# Altium PCB 4_layer_Memory_card_PCB.PcbDoc
Units mm, origin at the board's own origin, x right, y up, seen from the top; angles counter-clockwise.
Board outline 58.93 x 23.24 mm, 4 copper layers (Top Layer, GND Plane, Power Plane, Bottom Layer), stack 1.592 mm thick; 21 components, 19 nets, 90 pads, 35 vias.
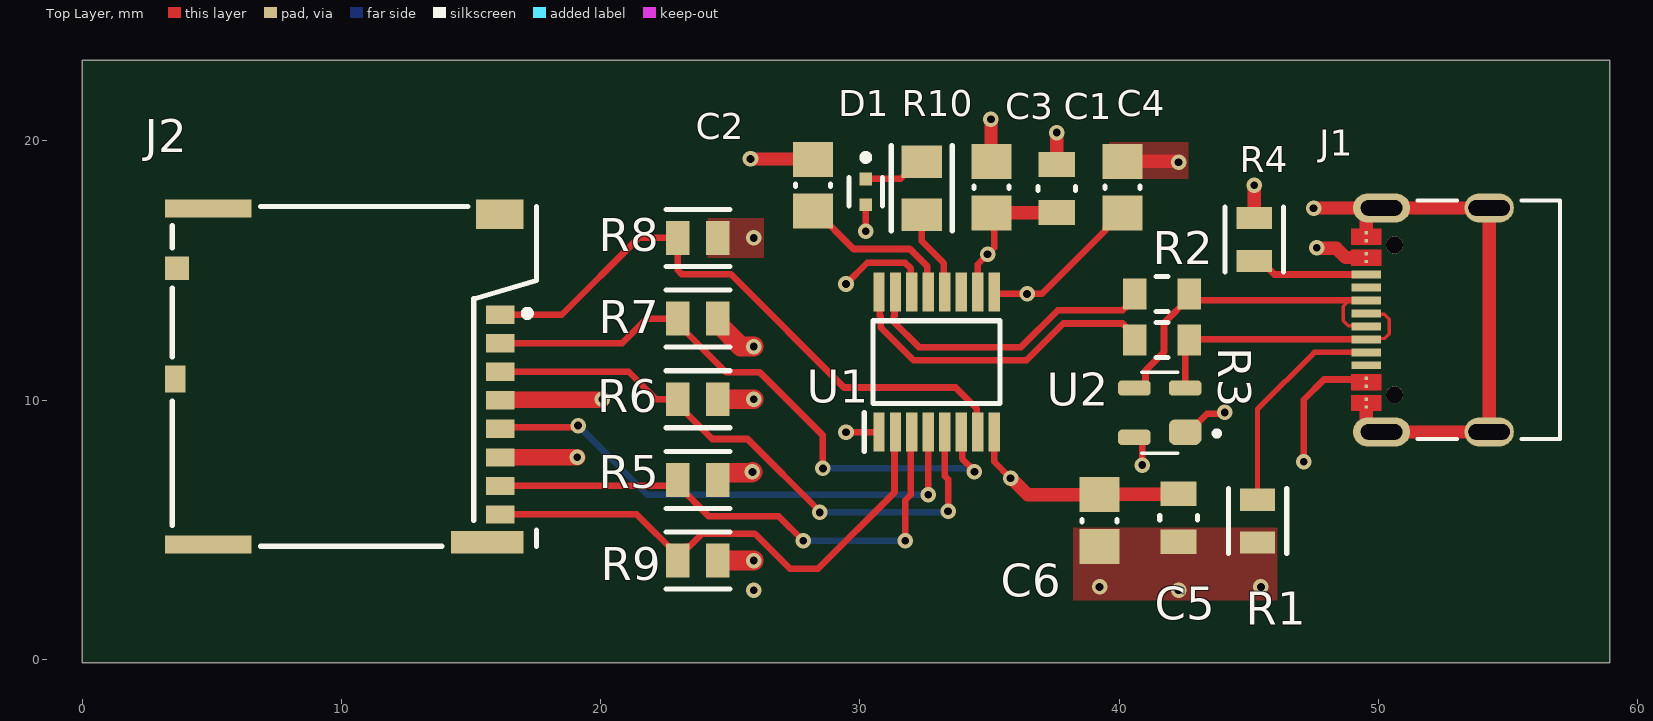
[diagram p0: Top Layer view]
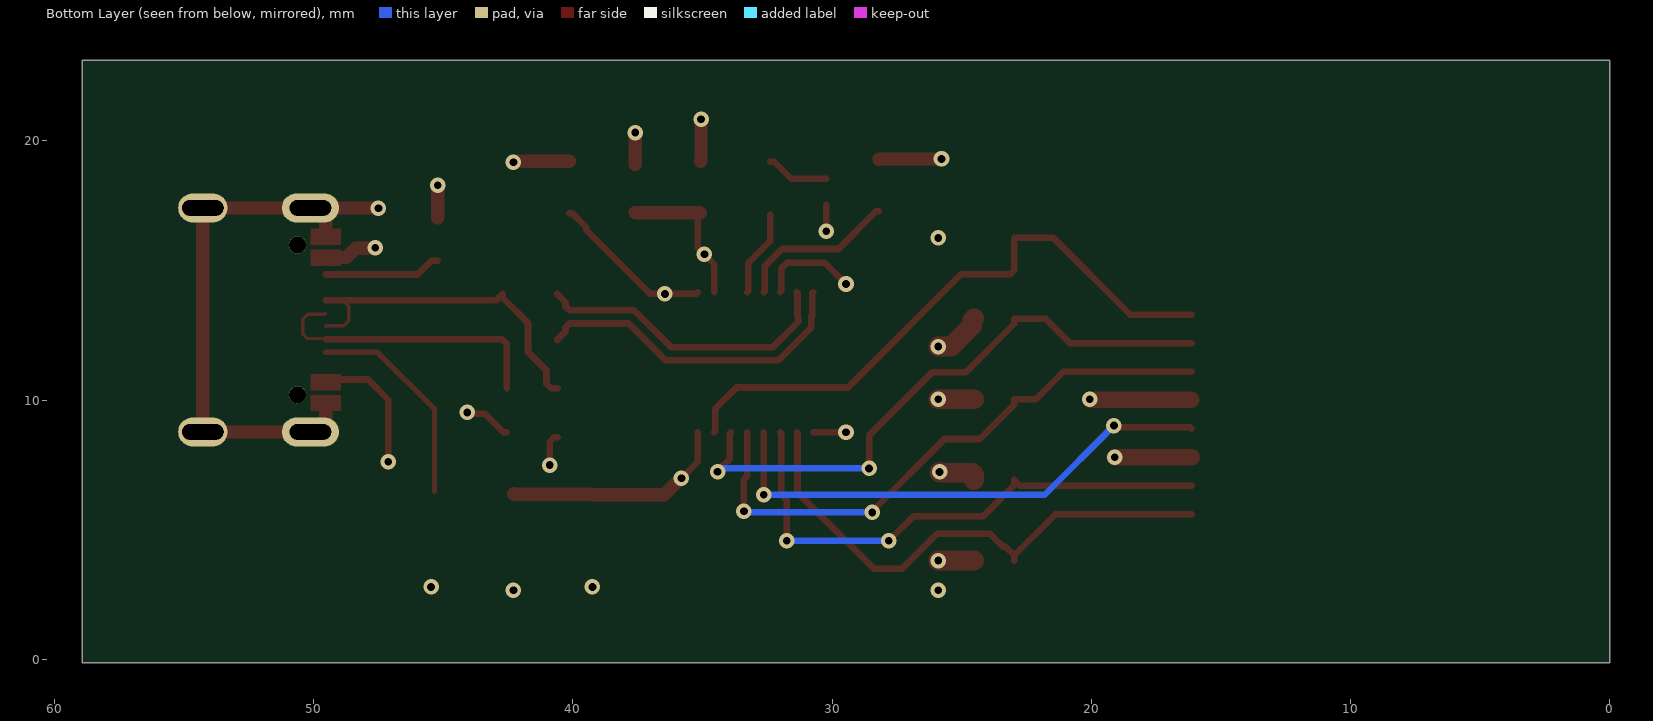
[diagram p1: Bottom Layer view, seen from below]
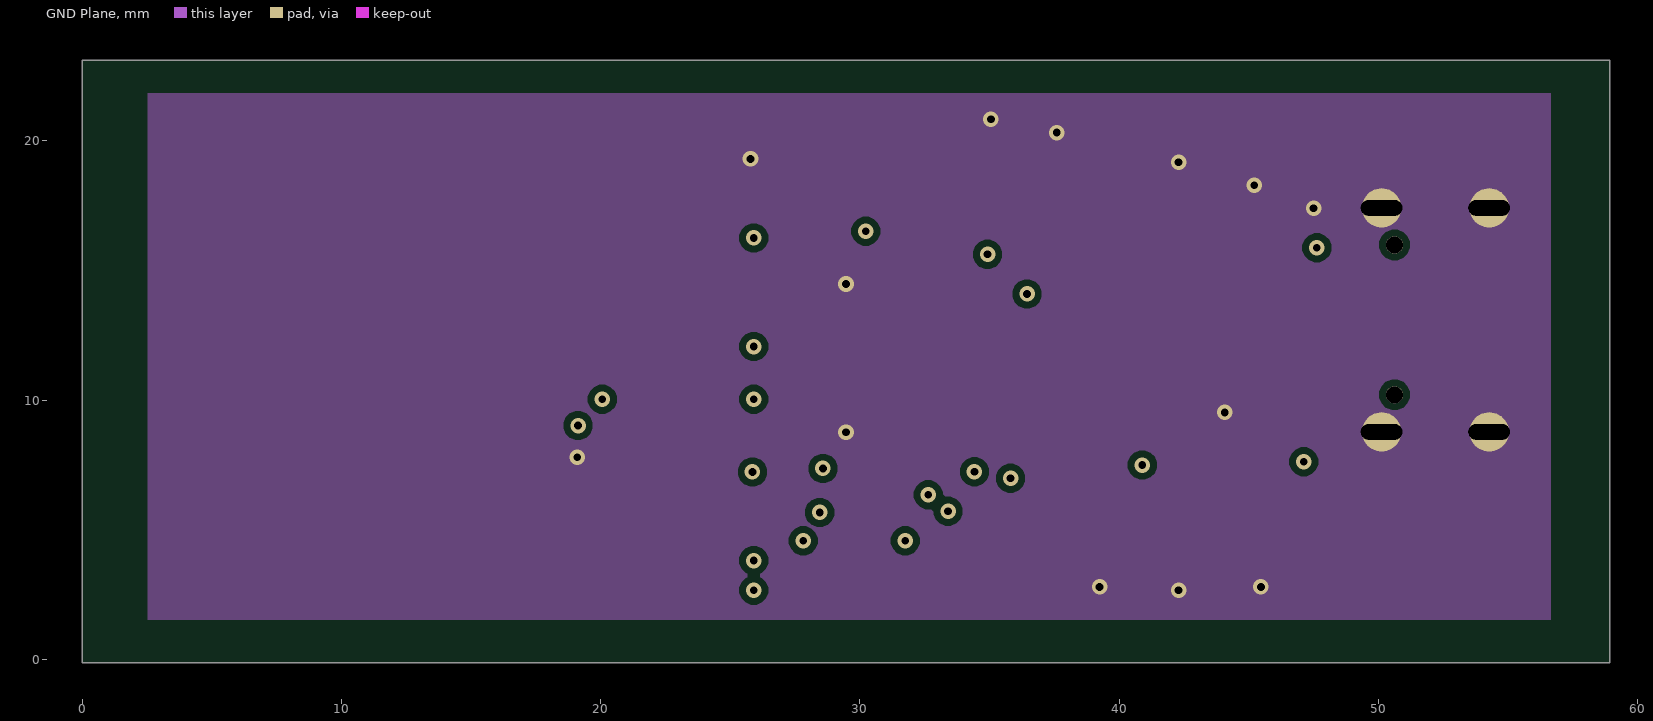
[diagram p2: GND Plane]
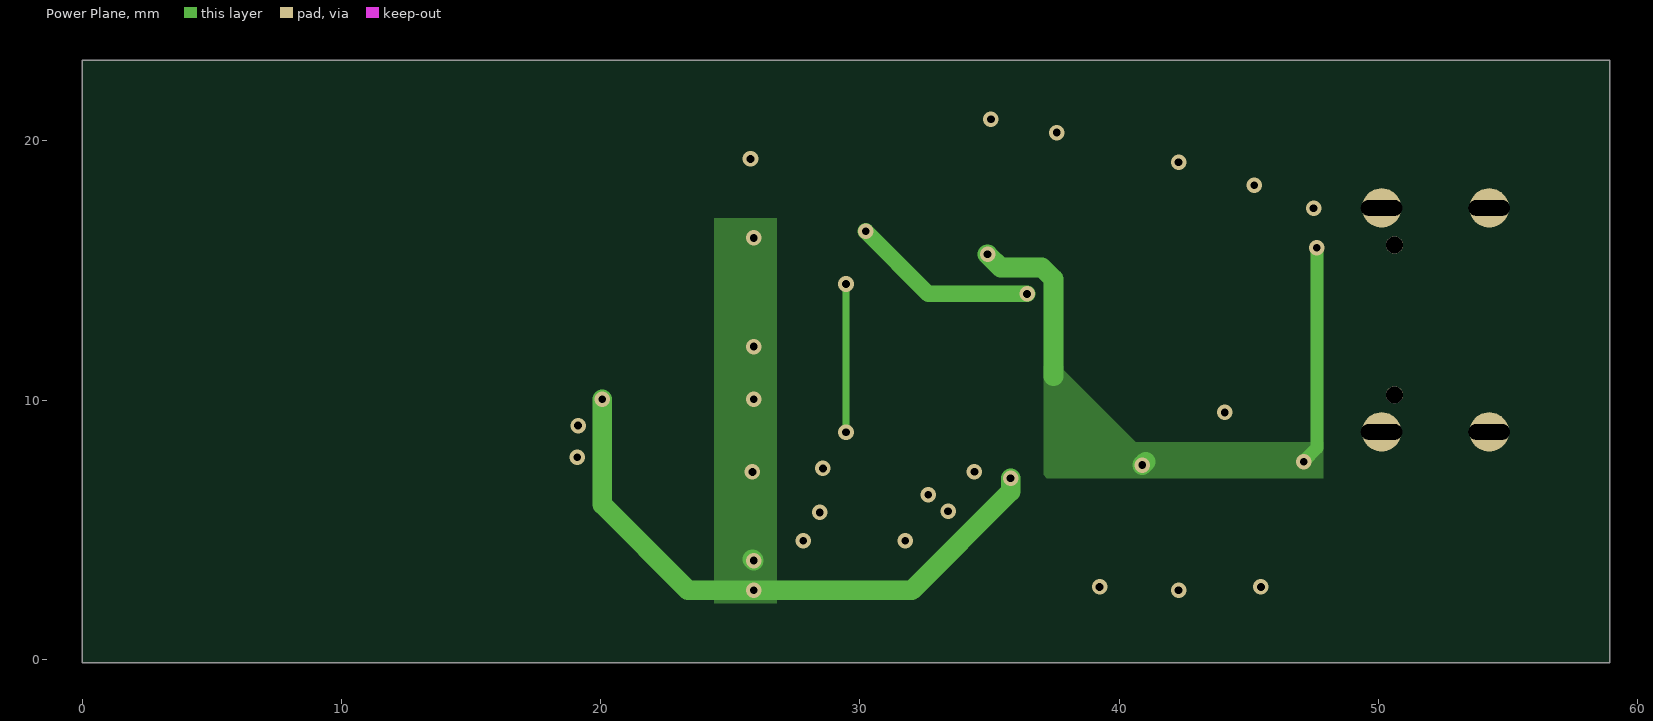
[diagram p3: Power Plane]
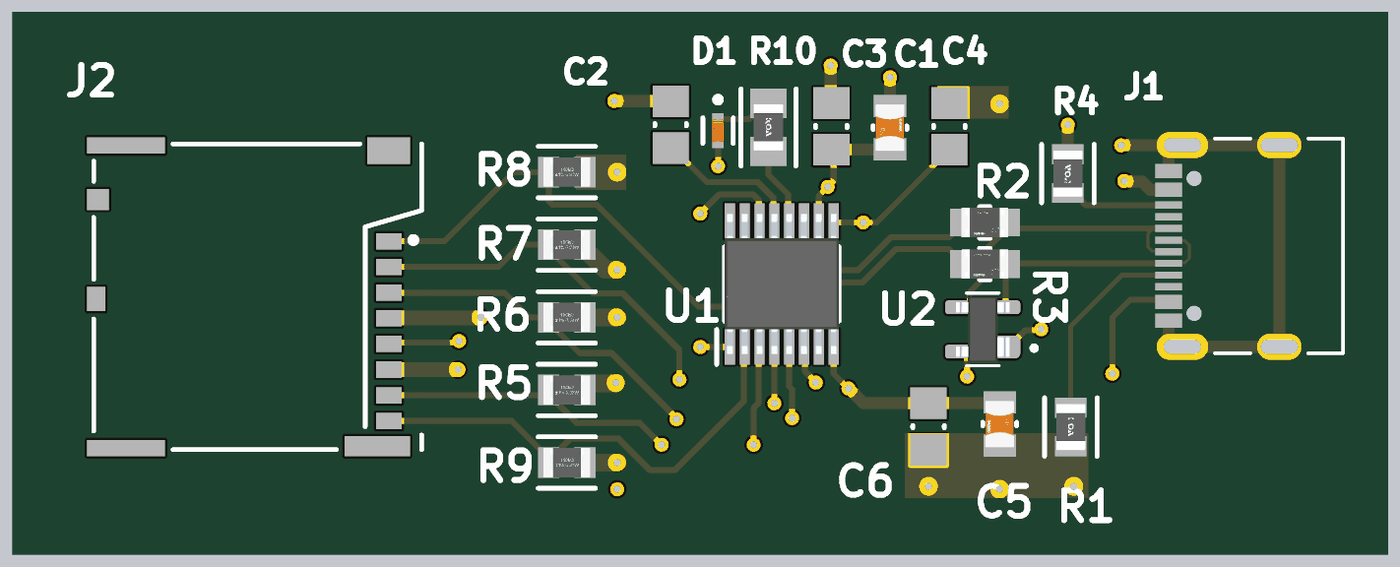
[diagram p4: 3D render of the assembled board from above, using the file's embedded part models]

## Layer stack, top to bottom
Top Solder: solder mask 0.0102, Solder Resist, Dk 3.5
Top Layer: signal copper 0.0356
Dielectric 2: prepreg 0.2104, PP-006, Dk 4.1
GND Plane: signal copper 0.0175
Dielectric 1: dielectric 1.065, FR-4, Dk 4.8
Power Plane: signal copper 0.0175
Dielectric 3: prepreg 0.2104, PP-006, Dk 4.1
Bottom Layer: signal copper 0.0356
Bottom Solder: solder mask 0.0102, Solder Resist, Dk 3.5

## Board outline
0,-0.127 58.928,-0.127 58.928,23.114 0,23.114

## Design rules (kind name [scope] priority, off if disabled: settings)
BoardOutlineClearance [All] p1: gap=0.5 ignorepadtopadclearanceinfootprint=FALSE
Clearance [All] p1: gap=0.254 ignorepadtopadclearanceinfootprint=TRUE
ComponentClearance [All] p1: gap=0.5 collisioncheckmode=3 verticalgap=0.254 showdistances=FALSE
DiffPairsRouting [All] p1: maxlimit=0.254 minlimit=0.254 mostfreqgap=0.254 toplayer_minwidth=0.102 toplayer_maxwidth=0.381 toplayer_prefwidth=0.381 midlayer1_minwidth=0.102 midlayer1_maxwidth=0.381 midlayer1_prefwidth=0.381 midlayer2_minwidth=0.102 midlayer2_maxwidth=0.381 midlayer2_prefwidth=0.381 bottomlayer_minwidth=0.102 bottomlayer_maxwidth=0.381 bottomlayer_prefwidth=0.381 maxuncoupledlength=12.7
MinimumSolderMaskSliver [All] p1: minsoldermaskwidth=0.127
PlaneConnect [All] p1: planeconnectstyle=Direct reliefexpansion=0.508 reliefentries=4 reliefconductorwidth=0.254 reliefairgap=0.254
PolygonConnect [All] p1: connectstyle=Direct reliefconductorwidth=0.254 reliefentries=4 polygonreliefangle="90 Angle" airgapwidth=0.254
RoutingVias [All] p1: holewidth=0.3 width=0.6 viastyle="Through Hole" minholewidth=0.3 minwidth=0.6 maxholewidth=0.3 maxwidth=0.6
SilkToSolderMaskClearance [IsPad] p1: minsilkscreentomaskgap=0.152 clearancetoexposedcopper=TRUE
SolderMaskExpansion [All] p1: expansion=0.102 istentingtop=FALSE
SupplyNets "Schematic Supply Nets" [InNet('GND')] p1: voltage=0.000
Width [All] p1: maxlimit=2.286 minlimit=0.127 preferedwidth=0.254
25 further rules are at their usual default settings.

## Classes and differential pairs
differential pair NewDifferentialPair1: +D_P -D_N

## Components (designator, comment, footprint, x,y, rotation, side; value= is the part's Value field where it differs from the comment)
C1 "1uF 0805" FP-CC0805-0_85-MFG 37.592,18.161 r90 top value="1 uF"
C2 "100nF 16V" CAPC0805(2012)145_M 28.194,18.288 r270 top value=100nF
C3 "100nF 16V" CAPC0805(2012)145_M 35.079,18.212 r270 top value=100nF
C4 "100nF 16V" CAPC0805(2012)145_M 40.132,18.212 r270 top value=100nF
C5 "1uF 0805" FP-CC0805-0_85-MFG 42.291,5.461 r270 top value="1 uF"
C6 "100nF 16V" CAPC0805(2012)145_M 39.243,5.35 r90 top value=100nF
D1 "HSMC-C280" FP-HSMC-C280-MFG 30.226,18.034 r270 top
J1 "USB Type C connector" CONN16_C16PIN_SHN 53.2,13.093 r90 top
J2 "microSD Memory Card" 5033981892 17.529,17.462 r270 top
R1 "5R1K" FP-RN73R2A-IPC_C 45.339,5.334 r270 top
R2 "22R" FP-RT0805-MFG 41.656,14.097 r180 top value=22Ω
R3 "22R" FP-RT0805-MFG 41.656,12.319 r180 top value=22Ω
R4 "5R1K" FP-RN73R2A-IPC_C 45.212,16.192 r90 top
R5 "10k" FP-CRGP0805-IPC_C 23.749,6.921 r0 top value=10KΩ
R6 "10k" FP-CRGP0805-IPC_C 23.749,10.033 r0 top value=10KΩ
R7 "10k" FP-CRGP0805-IPC_C 23.749,13.144 r0 top value=10KΩ
R8 "10k" FP-CRGP0805-IPC_C 23.749,16.256 r0 top value=10KΩ
R9 "10k" FP-CRGP0805-IPC_C 23.749,3.81 r0 top value=10KΩ
R10 "1K" FP-RN73R2A-IPC_A 32.385,18.17 r270 top
U1 "GL823K" SOP64P600X175-16N 32.957,11.463 r90 top
U2 "ESD protection diode" SOT190P230X110-4N 41.565,9.513 r180 top value=1pF

## Footprints (in the part's own frame and the unit in brackets; to place one, negate y for a bottom-side part, rotate by r counter-clockwise, add the part's x,y. Pads: shape width x height; smd on the part's side, far side on the other; paste and mask are expansions set on the pad)
5033981892 [mm]
  rect 0.7x1.1 smd: 1(4.17,-1.4) 2(5.27,-1.4) 3(6.37,-1.4) 4(7.47,-1.4) 5(8.57,-1.4) 6(9.67,-1.4) 7(10.77,-1.4) 8(11.87,-1.4)
  rect 0.9x0.93 smd: 9(2.38,-13.865)
  rect 1.05x0.78 smd: 10(6.645,-13.94)
  rect 0.7x3.33 smd: 11(13.03,-12.665) 14(0.07,-12.665)
  rect 0.86x2.8 smd: 12(12.95,-1.9)
  rect 1.14x1.83 smd: 13(0.29,-1.415)
  silkscreen extent 0,-14.05 13.1,0
CAPC0805(2012)145_M [mm] "Chip Capacitor, Body 2.0x1.2mm, Height 1.45mm, IPC Low Density"
  rect 1.35x1.55 smd: 1(-1,0) 2(1,0)
  silkscreen extent -0.05,-0.67 0.05,0.67, body extent -1.1,-0.72 1.1,0.72, height 1.45
CONN16_C16PIN_SHN [mil]
  round 26 hole 26 unplated paste-99999 mask+0: 29(-113.78,101.55) 30(113.78,101.55)
  rect 5x5 smd paste-2.5 mask-2.5: A1(-132.29,144.5) A4(-100.61,144.5) A9(100.61,144.5) A12(132.3,144.5) B1(120.3,144.5) B4(88.61,144.5) B9(-88.61,144.5) B12(-120.29,144.5)
  rect 12x45 smd paste+0 mask+0: A5(-49.22,144.5) A6(-9.85,144.5) A7(9.85,144.5) A8(-68.91,144.5) B5(68.92,144.5) B6(29.54,144.5) B7(-29.53,144.5) B8(49.23,144.5)
  oval 44x87 / inner round 60 / far side oval 44x87 hole 23.62 slot 62.99 at 90 deg paste-99999 mask+0: S1(-170.08,121.23) S2(170.08,121.23)
  oval 44x75 / inner round 60 / far side oval 44x75 hole 23.62 slot 62.99 at 90 deg paste-99999 mask+0: S3(-170.08,-42.15) S4(170.08,-42.15)
  Top Layer region: -114.29,122 -138.29,122 -138.29,167 -114.29,167
  Top Layer region: 114.3,167 138.3,167 138.3,122 114.3,122
  Top Layer region: 82.61,167 106.61,167 106.61,122 82.61,122
  Top Layer region: -106.61,122 -106.61,167 -82.61,167 -82.61,122
  silkscreen extent -181,-150 181,66
FP-CC0805-0_85-MFG [mm]
  rect 0.95x1.4 smd paste+0 mask+0: 1(-0.925,0) 2(0.925,0)
  silkscreen extent -0.08,-0.72 0.08,0.72, body extent -1.6,-1.05 1.6,1.05, height 0.25
FP-CRGP0805-IPC_C [mm]
  rect 0.906x1.31 smd paste+0 mask+0: 1(-0.776,0) 2(0.776,0)
  silkscreen extent -1.23,-1.1 1.23,1.1, body extent -1.33,-0.8 1.33,0.8, height 0.25
FP-HSMC-C280-MFG [mm]
  rect 0.5x0.5 smd paste+0 mask+0: 1(-0.5,0) 2(0.5,0)
  silkscreen extent -1.45,-0.65 0.55,0.65, body extent -0.85,-0.4 0.85,0.4, height 0.25
FP-RN73R2A-IPC_A [mm]
  rect 1.255x1.556 smd paste+0 mask+0: 1(-1.025,0) 2(1.025,0)
  silkscreen extent -1.65,-1.18 1.65,1.18, body extent -2.15,-1.28 2.15,1.28, height 0.25
FP-RN73R2A-IPC_C [mil]
  rect 33.67x53.39 smd paste+0 mask+0: 1(-32.5,0) 2(32.5,0)
  silkscreen extent -49,-44 49,44, body extent -53,-32 53,32, height 10
FP-RT0805-MFG [mm]
  rect 0.9x1.2 smd paste+0 mask+0: 1(-1.05,0) 2(1.05,0)
  silkscreen extent -0.23,-0.67 0.23,0.67, body extent -1.6,-0.77 1.6,0.77, height 0.25
SOP64P600X175-16N [mm]
  rect 1.5x0.435 smd: 1(-2.7,2.222) 2(-2.7,1.588) 3(-2.7,0.952) 4(-2.7,0.318) 5(-2.7,-0.318) 6(-2.7,-0.952) 7(-2.7,-1.588) 8(-2.7,-2.222) 9(2.7,-2.222) 10(2.7,-1.588) 11(2.7,-0.952) 12(2.7,-0.318) 13(2.7,0.318) 14(2.7,0.952) 15(2.7,1.588) 16(2.7,2.222)
  silkscreen extent -3.45,-2.45 1.6,2.79, body extent -3,-2.45 3,2.45, height 1.75
SOT190P230X110-4N [mm]
  rrect50% 1.26x0.99 smd: 1(-0.98,0.75)
  rrect50% 1.26x0.59 smd: 2(-0.98,-0.95) 3(0.98,-0.95) 4(0.98,0.95)
  silkscreen extent -2.3,-1.56 0.7,1.56, body extent -1.15,-1.45 1.15,1.45, height 1.1

## Part data
C1 C5: library part CMP-03422-000058-1, "CC0805 1 uF X7R 10.00% 16 V", Capacitance="1 uF", Manufacturer=Yageo, Manufacturer Part Number=CC0805KFX7R7BB105, Package=CC0805-0.85, Temperature="-30°C to +85°C", Temperature Characteristic=X7R, Temperature Range High=+85°C, Temperature Range Low=-30°C, Tolerance=0.1, Voltage Rating="16 V", Automotive=No, Category=Cap, ComponentLink2Description=Datasheet, ComponentLink2URL=http://www.yageo.com/documents/recent/UPY-GPHC_Y5V_6.3V-to-50V_8.pdf, Device Class L1="Passive Components", Device Class L2=Capacitors, Device Class L3="Ceramic Capacitors", Footprint Url=http://www.yageo.com/exep/pages/download/literatures/UPY-C_GEN_24.pdf, Height=0.95mm, Ipc Land Pattern Name=CAPC200125X85, Lead Free=Yes, Material=Ceramic, Mouser Description="Multilayer Ceramic Capacitors MLCC - SMD/SMT 1.0uF 16V X7R 10%", Octopart=https://octopart.com/cc0805kfx7r7bb105-yageo-30261725, RoHS=TRUE
C2 C3 C4 C6: library part CMP-1036-04399-1, "CAP 100nF 16V ±5% 0805 (2012 Metric) Thickness 1.45mm SMD", Case-EIA=0805, Case-Metric=2012, Rated Voltage="16 V", Tolerance=Â±5%, Max Thickness="1.45 mm", Technology=SMT
D1: library part CMP-18399-000022-1, "LED RED DIFFUSED 0402 SMD", Case Code (Imperial)=0402, Case Code (Metric)=1005, Color=Red, Forward Current=20mA, Forward Voltage=1.9V, Lens Color=White, Max Operating Temperature=85°C, Max Power Dissipation=60mW, Min Operating Temperature=-40°C, Package Quantity=4000, Reverse Voltage=5V, Case/Package=0402, Contact Plating=Gold, Depth=0.5mm, Dominant Wavelength=626nm, Height=0.4mm, Illumination Color=Red, Lead Free="Lead Free", Length=1mm, Lens Style=Diffused, Lens Transparency=Diffused, Luminous Flux=155lm, Luminous Intensity=90mcd, Mount="Surface Mount", Number of Elements=1, Number of LEDs=1, Number of Pins=2, Packaging="Tape and Reel", Power Dissipation=60mW, Power Rating=60mW, Radiation Hardening=No, REACH SVHC="No SVHC", Test Current=20mA, Viewing Angle=130°, Wavelength=626nm, Width=0.5mm
J1: library part "TYPE-C 16PIN 2MD(073) SHOU HAN", "https://jlcpcb.com/partdetail/ShouHan-TYPE_C_16PIN_2MD_073/C2765186?utm_source=chatgpt.com"
J2: library part 503398-1892, "1.10mm Pitch microSD Memory Card Connector, Normal Mount Surface Mount, Push-Push Type, 1.28mm Height", Contact Resistance=100mΩ, Current Rating=500mA, Insulation Resistance=1GΩ, Manufacturer=Molex, Manufacturer Lifecycle Status=ACTIVE, Max Operating Temperature=85°C, Min Operating Temperature=-25°C, Supplier Part Number=8801277, Voltage Rating=10V, Category="Memory Connectors", China RoHS=Compliant, ComponentLink1Description=https://datasheet.octopart.com:443/503398-1892-Molex-datasheet-180775278.pdf?src-supplier=IHS, ComponentLink1URL=https://datasheet.octopart.com:443/503398-1892-Molex-datasheet-180775278.pdf?src-supplier=IHS, ComponentLink2Description=https://datasheet.octopart.com:443/503398-1892-Molex-datasheet-138898078.pdf?src-supplier=Sager+Electronics, ComponentLink2URL=https://datasheet.octopart.com:443/503398-1892-Molex-datasheet-138898078.pdf?src-supplier=Sager+Electronics, ComponentLink3Description=https://datasheet.octopart.com:443/503398-1892-Molex-datasheet-16405786.pdf?src-supplier=Sager+Electronics, ComponentLink3URL=https://datasheet.octopart.com:443/503398-1892-Molex-datasheet-16405786.pdf?src-supplier=Sager+Electronics, ComponentLink4Description=https://sigma.octopart.com:443/138898079/technical_drawing/Molex-503398-1892.pdf?src-supplier=Upverter, ComponentLink4URL=https://sigma.octopart.com:443/138898079/technical_drawing/Molex-503398-1892.pdf?src-supplier=Upverter, ComponentLink5Description=https://sigma.octopart.com:443/16405789/technical_drawing/Molex-503398-1892.pdf?src-supplier=Molex, ComponentLink5URL=https://sigma.octopart.com:443/16405789/technical_drawing/Molex-503398-1892.pdf?src-supplier=Molex, ComponentLink6Description=https://datasheet.octopart.com:443/503398-1892-Molex-datasheet-66628509.pdf?src-supplier=Farnell, ComponentLink6URL=https://datasheet.octopart.com:443/503398-1892-Molex-datasheet-66628509.pdf?src-supplier=Farnell, ComponentLink7Description=https://datasheet.octopart.com:443/503398-1892-Molex-datasheet-10952502.pdf?src-supplier=Newark, ComponentLink7URL=https://datasheet.octopart.com:443/503398-1892-Molex-datasheet-10952502.pdf?src-supplier=Newark, ComponentLink8Description=https://datasheet.octopart.com:443/503398-1892-Molex-datasheet-62087832.pdf?src-supplier=Newark, ComponentLink8URL=https://datasheet.octopart.com:443/503398-1892-Molex-datasheet-62087832.pdf?src-supplier=Newark, ComponentLink9Description=https://datasheet.octopart.com:443/503398-1892-Molex-datasheet-154753182.pdf?src-supplier=Master+Electronics, ComponentLink9URL=https://datasheet.octopart.com:443/503398-1892-Molex-datasheet-154753182.pdf?src-supplier=Master+Electronics, ComponentLink10Description=https://datasheet.octopart.com:443/503398-1892-Molex-datasheet-17852981.pdf?src-supplier=element14+APAC, ComponentLink10URL=https://datasheet.octopart.com:443/503398-1892-Molex-datasheet-17852981.pdf?src-supplier=element14+APAC, ComponentLink11Description=https://datasheet.octopart.com:443/503398-1892-Molex-datasheet-140185767.pdf?src-supplier=RS+(Formerly+Allied+Electronics), ComponentLink11URL=https://datasheet.octopart.com:443/503398-1892-Molex-datasheet-140185767.pdf?src-supplier=RS+(Formerly+Allied+Electronics), ComponentLink12Description=https://datasheet.octopart.com:443/503398-1892-Molex-datasheet-120152253.pdf?src-supplier=RS+(Formerly+Allied+Electronics), ComponentLink12URL=https://datasheet.octopart.com:443/503398-1892-Molex-datasheet-120152253.pdf?src-supplier=RS+(Formerly+Allied+Electronics), ComponentLink13Description=https://datasheet.octopart.com:443/503398-1892-Molex-datasheet-62059324.pdf?src-supplier=RS+(Formerly+Allied+Electronics), ComponentLink13URL=https://datasheet.octopart.com:443/503398-1892-Molex-datasheet-62059324.pdf?src-supplier=RS+(Formerly+Allied+Electronics), ComponentLink14Description=https://datasheet.octopart.com:443/503398-1892-Molex-datasheet-24577251.pdf?src-supplier=TME, ComponentLink14URL=https://datasheet.octopart.com:443/503398-1892-Molex-datasheet-24577251.pdf?src-supplier=TME, ComponentLink15Description=http://sigma.octopart.com:80/16405788/rohs_statement/Molex-503398-1892.pdf?src-supplier=Compliance+Statements, ComponentLink15URL=http://sigma.octopart.com:80/16405788/rohs_statement/Molex-503398-1892.pdf?src-supplier=Compliance+Statements, ComponentLink16Description=http://sigma.octopart.com:80/reach_statement/Molex-company-74.pdf?src-supplier=Compliance+Statements, ComponentLink16URL=http://sigma.octopart.com:80/reach_statement/Molex-company-74.pdf?src-supplier=Compliance+Statements, ComponentLink17Description=http://sigma.octopart.com:80/rohs_statement/Molex-company-73.pdf?src-supplier=Compliance+Statements, ComponentLink17URL=http://sigma.octopart.com:80/rohs_statement/Molex-company-73.pdf?src-supplier=Compliance+Statements, ComponentLink18Description=http://sigma.octopart.com:80/conflict_mineral_statement/Molex-company-72.pdf?src-supplier=Compliance+Statements, ComponentLink18URL=http://sigma.octopart.com:80/conflict_mineral_statement/Molex-company-72.pdf?src-supplier=Compliance+Statements, Connector Type=Connector, Contact Gender=Female, Contact Material="Gold, Tin", Contact Plating=Gold, Country of Origin=VN, Depth=14.05mm, Export Control Classification Number (ECCN) Code=EAR99, Gender=Male, Halogen Free="Low Halogen", Harmonized Tariff Schedule (HTS) Code=8536.69.40.40, Height=1.4mm, Housing Material="Stainless Steel", Introduction Date=2013-02-28, Length=13.6mm, Lifecycle Status=Production, Manufacturer Part Number=503398-1892, Memory Format=FLASH, Mounting Technology="Surface Mount", Number of Circuits=8, Number of Contacts=8, Number of Ports=1, Number of Rows=1, Orientation="Right Angle", Packaging="Cut Tape", Pins=8, Pitch=1.1mm, Plating=Tin, Plating Thickness=508nm, Pricing="1=1.86, 10=1.42, 20=1.39, 50=1.36, 100=1.32 (GBP)", Radiation Hardening=No, REACH SVHC=Yes, RoHS=Compliant, Schedule B="8536695050, 8536695050|8536695050, 8536695050|8536695050|8536695050, 8536695050|8536695050|8536695050|8536695050", Stock=952, Supplier=RS, Terminal Pitch=1.1mm, Termination=Solder, Voltage Rating (AC)=10V, Width=14.05mm
R1 R4: library part CMP-04015-014497-1, "5.1kΩ ±0.05% 0.125W, 1/8W Chip Resistor 0805 (2012 Metric) Moisture Resistant Thin Film"
R2 R3: library part CMP-03412-017128-1, "RES SMD 22 OHM 1% 1/8W 0805", Manufacturer=Yageo, Manufacturer Part Number=RT0805FRD0722RL, Package=RT0805, Power Rating=0.125W, Resistance=22Ω, Temperature="-55°C to +155°C", Temperature Coefficient="25 ppm/°C", Temperature Range High=+155°C, Temperature Range Low=-55°C, Tolerance=0.0001, Voltage Rating=150V, Automotive=No, Category=Res, ComponentLink2Description=Datasheet, ComponentLink2URL=http://www.yageo.com/documents/recent/PYu-RT_1-to-0.01_RoHS_L_9.pdf, Composition="Thin Film", Device Class L1="Passive Components", Device Class L2=Resistors, Device Class L3="Chip SMD Resistors", Digikey Description="RES SMD 22 OHM 1% 1/8W 0805", Footprint Url=http://www.yageo.com/exep/pages/download/literatures/PYu-R_Mount_10.pdf, Height=0.6mm, Ipc Land Pattern Name=RESC200125X50, Lead Free=Yes, Octopart=https://octopart.com/rt0805frd0722rl-yageo-71399874, RoHS=TRUE, Series=RT
R5 R6 R7 R8 R9: library part CMP-03211-006861-1, "CRGP 0805 10K 1% CRGP0805F10K", Ambient Temperature Range High=+70°C, Manufacturer=TE, Manufacturer Part Number=CRGP0805F10K, Package=CRGP0805, Power Rating=0.33W, Resistance=10KΩ, Temperature="-55°C to +155°C", Temperature Coefficient=±100ppm/°C, Temperature Range High=+155°C, Temperature Range Low=-55°C, Tolerance=0.01, Voltage Rating=150V, Automotive=No, Category=Res, ComponentLink2Description=Datasheet, ComponentLink2URL=https://www.mouser.com/datasheet/2/418/NG_DS_9-1773463-9_A-1358566.pdf, Composition="Thick Film", Device Class L1="Passive Components", Device Class L2=Resistors, Device Class L3="Chip SMD Resistors", Digikey Description="CRGP 0805 10K 1%", Height=0.65mm, Ipc Land Pattern Name=RESC200125X55, Lead Free=Yes, Octopart=https://octopart.com/crgp0805f10k-te+connectivity-91018782, RoHS=TRUE, Series=CRGP
R10: library part CMP-04015-026717-1, "1kΩ ±0.1% 0.125W, 1/8W Chip Resistor 0805 (2012 Metric) Moisture Resistant Thin Film"
U1: library part GL823K-HCY04, "USB 2.0 card reader controller"
U2: library part PRTR5V0U2X,215, "PRTR Series 9 V 1 pF Rail-to-Rail ESD Protection Diode - SOT-143B", Ambient Temperature Range High=85°C, Breakdown Voltage=7.5V, Manufacturer=Nexperia, Manufacturer Lifecycle Status="RELEASED FOR SUPPLY", Max Breakdown Voltage=9V, Min Breakdown Voltage=6V, Min Operating Temperature=-40°C, Operating Supply Voltage=700mV, Peak Reverse Current=100nA, Reverse Standoff Voltage=3V, Supplier Part Number=1727-3884-1-ND, Category="ESD and Circuit Protection ICs", China RoHS=Compliant, ComponentLink1Description=https://datasheet.octopart.com:443/PRTR5V0U2X%2C215-Nexperia-datasheet-180924939.pdf?src-supplier=IHS, ComponentLink2Description=https://datasheet.octopart.com:443/PRTR5V0U2X%2C215-Nexperia-datasheet-5405949.pdf?src-supplier=IHS, ComponentLink2URL=https://datasheet.octopart.com:443/PRTR5V0U2X%2C215-Nexperia-datasheet-5405949.pdf?src-supplier=IHS, ComponentLink3Description=https://datasheet.octopart.com:443/PRTR5V0U2X%2C215-Nexperia-datasheet-137756210.pdf?src-supplier=Newark, ComponentLink3URL=https://datasheet.octopart.com:443/PRTR5V0U2X%2C215-Nexperia-datasheet-137756210.pdf?src-supplier=Newark, ComponentLink4Description=https://sigma.octopart.com:443/138810744/technical_drawing/Nexperia-PRTR5V0U2X%2C215.pdf?src-supplier=Upverter, ComponentLink4URL=https://sigma.octopart.com:443/138810744/technical_drawing/Nexperia-PRTR5V0U2X%2C215.pdf?src-supplier=Upverter, ComponentLink5Description=https://datasheet.octopart.com:443/PRTR5V0U2X%2C215-Nexperia-datasheet-87582154.pdf?src-supplier=Nexperia, ComponentLink5URL=https://datasheet.octopart.com:443/PRTR5V0U2X%2C215-Nexperia-datasheet-87582154.pdf?src-supplier=Nexperia, ComponentLink6Description=https://datasheet.octopart.com:443/PRTR5V0U2X%2C215-NXP-Semiconductors-datasheet-15938047.pdf?src-supplier=iiiC, ComponentLink6URL=https://datasheet.octopart.com:443/PRTR5V0U2X%2C215-NXP-Semiconductors-datasheet-15938047.pdf?src-supplier=iiiC, ComponentLink7Description=http://sigma.octopart.com:80/reach_statement/NXP-Semiconductors-company-13.pdf?src-supplier=Compliance+Statements, ComponentLink7URL=http://sigma.octopart.com:80/reach_statement/NXP-Semiconductors-company-13.pdf?src-supplier=Compliance+Statements, ComponentLink8Description=http://sigma.octopart.com:80/rohs_statement/NXP-Semiconductors-company-12.pdf?src-supplier=Compliance+Statements, ComponentLink8URL=http://sigma.octopart.com:80/rohs_statement/NXP-Semiconductors-company-12.pdf?src-supplier=Compliance+Statements, Contact Plating=Tin, Country of Origin="Mainland China", Direction=Bidirectional, Export Control Classification Number (ECCN) Code=EAR99, Harmonized Tariff Schedule (HTS) Code=8541.10.00.50, Height=1.1mm, Introduction Date=2005-09-23, Lifecycle Status=Production, Manufacturer Part Number=PRTR5V0U2X,215, Max Operating Temperature=85°C, Number of Channels=2, Number of Elements=1, Number of Terminals=4, Pins=4, Polarity=Unidirectional, Pricing="1=0.66, 10=0.41, 100=0.2626, 500=0.19912, 1000=0.17862, 3000=0.15255, 6000=0.13942, 9000=0.13273, 15000=0.1252, 21000=0.12075, 30000=0.11642, 75000=0.11275 (USD)", REACH SVHC=Yes, RoHS=Compliant, Schedule B="8541100080, 8541100080|8541100080|8541100080|8541100080|8541100080|8541100080|8541100080|8541100080|8541100080|8541100080|8541100080|8541100080|8541100080|8541100080|8541100080|8541100080|8541100080|8541100080|8541100080|8541100080|8541100080|8541100080|8541100080|85", Supplier=DigiKey

## Via types
v1: diameter 0.6, hole 0.3, Top Layer to Bottom Layer, 35 vias

## Nets (pads, with @x,y where several pads share a name; then routed paths per layer and width w, separated by ;. In a path a pad name is that pad's centre, name@x,y a point inside that pad or via, vN(x,y) a via of type N, cw(c..) or ccw(c..) an arc to the next point about the centre after c; other vN are vias at no path point)
3.3_VDDA: C2.2 U1.13 | length 6.3
  Top Layer w0.254: C2.2 28.294,17.288 29.753,15.829 31.928,15.829 32.604,15.153 32.604,14.198 U1.13
3V_VDD: C4.2 D1.2 U1.9 | length 14.7
  Top Layer w0.254: v1(30.226,16.51) D1.2 ; U1.9 35.245,14.097 v1@36.543,14.097 ; v1(36.449,14.097) 37.017,14.097 39.484,16.564 39.484,16.663 40.032,17.211 C4.2
  Power Plane w0.635: v1(30.226,16.51) 32.639,14.097 v1(36.449,14.097)
5V_BUS: C1.1 C3.2 J1.A4 J1.A9 J1.B4 J1.B9 U1.10 U2.4 | length 29.7
  Top Layer w0.254: U1.10 34.545,15.241 v1(34.925,15.621) 35.179,15.875 35.179,17.111 C3.2 ; U2.4 40.728,8.563 40.894,8.397 v1(40.894,7.493) ; v1(47.117,7.62) 47.117,10.011 47.901,10.795 49.483,10.795 J1.B9
  Top Layer w0.508: C3.2 35.091,17.224 37.58,17.224 C1.1 ; v1(47.625,15.875) 47.643,15.857 48.379,15.857 48.742,15.494 49.53,15.494
  Power Plane w0.508: v1(47.117,7.62) 47.117,7.645 47.625,8.153 v1(47.625,15.875)
  Power Plane w0.762: v1(34.925,15.621) 35.433,15.113 37.019,15.113 37.465,14.667 37.465,10.922 ; v1(40.894,7.493) v1@41.021,7.62
D_N: R3.2 U1.16 | length 12.7
  Top Layer w0.254: U1.16 30.77,14.128 30.77,13.255 30.798,13.228 30.798,12.807 32.07,11.535 36.427,11.535 37.846,12.954 40.134,12.954 40.283,12.805 40.283,12.642 R3.2
D_P: R2.2 U1.15 | length 11.8
  Top Layer w0.254: U1.15 31.334,14.128 31.334,13.255 31.306,13.228 31.306,13.017 32.28,12.043 36.217,12.043 37.636,13.462 40.134,13.462 40.283,13.611 40.283,13.774 R2.2
DAT0: J2.7 R5.1 U1.3 | length 21.1
  Top Layer w0.254: J2.7 22.743,6.692 R5.1 22.973,6.72 24.177,5.516 26.869,5.516 v1(27.813,4.572) ; v1(31.75,4.572) 31.75,6.14 31.958,6.348 31.958,7.846 31.968,7.855 31.968,8.725 U1.3
  Bottom Layer w0.254: v1(27.813,4.572) v1(31.75,4.572)
DAT1: J2.8 R9.1 U1.2 | length 20.7
  Top Layer w0.254: J2.8 21.393,5.592 R9.1@22.973,4.012 ; U1.2 31.334,8.728 31.334,6.442 28.384,3.492 27.303,3.492 25.95,4.846 23.908,4.846 23.4,4.338 23.299,4.338 R9.1@22.973,4.012 ; R9.1@22.973,4.012 R9.1 R9.1@22.973,4.012
DAT2: J2.1 R8.1 U1.7 | length 24
  Top Layer w0.254: J2.1 18.499,13.292 21.463,16.256 R8.1 22.973,15.008 23.122,14.859 25.019,14.859 29.391,10.487 33.691,10.487 34.508,9.671 34.508,8.801 U1.7
DAT3: J2.2 R7.1 U1.6 | length 23.7
  Top Layer w0.254: J2.2 20.828,12.192 21.78,13.144 R7.1 22.973,12.943 24.847,11.069 26.142,11.069 28.575,8.636 v1(28.575,7.366) ; U1.6 33.947,8.725 33.947,7.732 34.417,7.261 v1(34.417,7.239)
  Bottom Layer w0.254: v1(28.575,7.366) 34.196,7.366 34.323,7.239 v1(34.417,7.239)
GND: C1.2 C2.1 C3.1 C4.1 C5.2 C6.1 J1.A1 J1.A12 J1.B1 J1.B12 J1.S1 J1.S2 J1.S3 J1.S4 J2.6 R1.2 R4.2 U1.1 U1.14 U2.1 | length 46.7
  Top Layer w0.254: v1(29.464,8.763) U1.1 ; v1(29.464,14.478) 30.28,15.294 31.744,15.294 31.968,15.071 31.968,14.2 U1.14 ; U2.1 42.68,8.763 43.388,9.471 44.015,9.471 v1(44.069,9.525)
  Top Layer w0.508: v1(25.781,19.304) 25.789,19.296 28.186,19.296 C2.1 ; v1(35.052,20.828) 35.052,19.238 C3.1 ; C1.2 v1(37.592,20.32) ; C4.1 42.232,19.212 42.266,19.177 v1(42.291,19.177) ; R4.2 v1(45.212,18.288) ; v1(47.498,17.399) 47.505,17.406 50.114,17.406 J1.S2 ; J1.A1 49.53,9.054 49.812,8.773 J1.S1 J1.S3 J1.S4 J1.S2 ; J1.A12 49.53,17.131 49.812,17.413 J1.S2
  Top Layer w0.635: J2.6 v1(19.095,7.792)
  Power Plane w0.254: v1(29.464,8.763) v1(29.464,14.478)
  other v1: 42.291,2.667 39.243,2.794 45.466,2.794
LED: R10.2 U1.12 | length 3.4
  Top Layer w0.254: R10.2 32.385,16.136 33.238,15.284 33.238,14.2 U1.12
NetD1_1: D1.1 R10.1 | length 2.4
  Top Layer w0.254: D1.1 31.573,18.534 32.235,19.196 R10.1
NetJ1_A5: J1.A5 R1.1 | length 8.3
  Top Layer w0.203: R1.1@45.339,6.477 45.339,9.652 47.529,11.842 J1.A5
NetJ1_B5: J1.B5 R4.1 | length 4.5
  Top Layer w0.254: R4.1 45.462,15.367 45.986,14.843 J1.B5
SD_3V3: C5.1 C6.2 J2.4 R5.2 R6.2 R7.2 R8.2 R9.2 U1.8 | length 42.4
  Top Layer w0.254: J2.4 J2.4@16.15,10.012 ; U1.8 35.179,7.62 v1(35.814,6.985)
  Top Layer w0.508: v1(35.814,6.985) 35.839,6.985 36.474,6.35 C6.2 39.261,6.368 42.273,6.368 C5.1
  Top Layer w0.635: J2.4@16.15,10.012 v1@20.045,10.012
  Top Layer w0.762: R9.2 v1(25.908,3.81) ; R5.2 24.525,7.123 24.597,7.195 25.818,7.195 v1(25.854,7.231) ; R6.2 v1(25.908,10.033) ; R7.2 24.597,13.072 24.597,12.871 25.403,12.065 v1(25.908,12.065)
  Power Plane w0.762: v1(20.066,10.033) 20.066,5.969 23.368,2.667 v1(25.908,2.667) 32.004,2.667 35.814,6.477 v1(35.814,6.985) ; v1@25.854,3.864 v1(25.908,3.81)
  other v1: 25.908,16.256
SDCLK: J2.5 U1.4 | length 20.1
  Top Layer w0.254: J2.5 16.192,8.955 19.069,8.955 v1(19.131,9.017) ; v1(32.639,6.35) U1.4
  Bottom Layer w0.254: v1(19.131,9.017) 21.798,6.35 v1(32.639,6.35)
SDCMD: J2.3 R6.1 U1.5 | length 22.8
  Top Layer w0.254: J2.3 21.082,11.092 22.141,10.033 R6.1 22.973,9.831 24.305,8.499 25.664,8.499 28.448,5.715 v1(28.448,5.669) ; U1.5 33.275,7.071 33.401,6.945 v1(33.401,5.715)
  Bottom Layer w0.254: v1(28.448,5.669) 33.355,5.669 v1(33.401,5.715)
USB_D_N: J1.A7 J1.B7 R3.1 U2.2 | length 11.3
  Top Layer w0.127: J1.B7 49.56,12.373 50.233,12.373 50.419,12.559 50.419,13.127 50.233,13.313 49.56,13.313 J1.A7
  Top Layer w0.254: U2.2 42.545,12.158 R3.1 42.73,12.343 J1.B7
USB_D_P: J1.A6 J1.B6 R2.1 U2.3 | length 13.4
  Top Layer w0.127: 48.827,13.813 48.641,13.627 48.641,13.059 48.827,12.873 49.5,12.873 J1.A6
  Top Layer w0.254: U2.3 40.848,10.463 41.015,10.629 41.015,11.139 41.729,11.853 41.729,12.97 42.706,13.947 R2.1 42.96,13.843 J1.B6
pads on no net: J1.29 J1.30 J1.A8 J1.B8 J2.9 J2.10 J2.11 J2.12 J2.13 J2.14 U1.11

## Polygon pours and split planes (outlines as drawn)
GND on Top Layer "NONET_L01_P-001" (solid, remove dead copper, pour order 4): 39.624,19.939 39.624,18.542 42.672,18.542 42.672,19.939
GND on Top Layer "NONET_L01_P-001" (solid, remove dead copper, pour order 3): 38.227,5.08 46.101,5.08 46.101,2.286 38.227,2.286
SD_3V3 on Top Layer "NONET_L01_P-001" (solid, remove dead copper, pour order 2): 24.13,17.018 26.289,17.018 26.289,15.494 24.13,15.494
GND on GND Plane "NONET_L01_P-001" (solid, remove dead copper, pour order 1): 2.54,21.844 2.54,1.524 56.642,1.524 56.642,21.844
5V_BUS on Power Plane "NONET_L01_P-001" (solid, remove dead copper, pour order 7): 37.084,7.112 37.211,6.985 40.64,6.985 40.64,8.382 37.846,11.176 37.846,11.303 37.084,11.303
5V_BUS on Power Plane "NONET_L01_P-001" (solid, remove dead copper, pour order 6): 40.64,6.985 47.879,6.985 47.879,8.382 40.64,8.382
SD_3V3 on Power Plane "NONET_L01_P-001" (solid, remove dead copper, pour order 5): 24.384,17.018 26.797,17.018 26.797,2.159 24.384,2.159